# EAGLE board mapleCUx_large_088-Stripped (EAGLE 7.3.0)
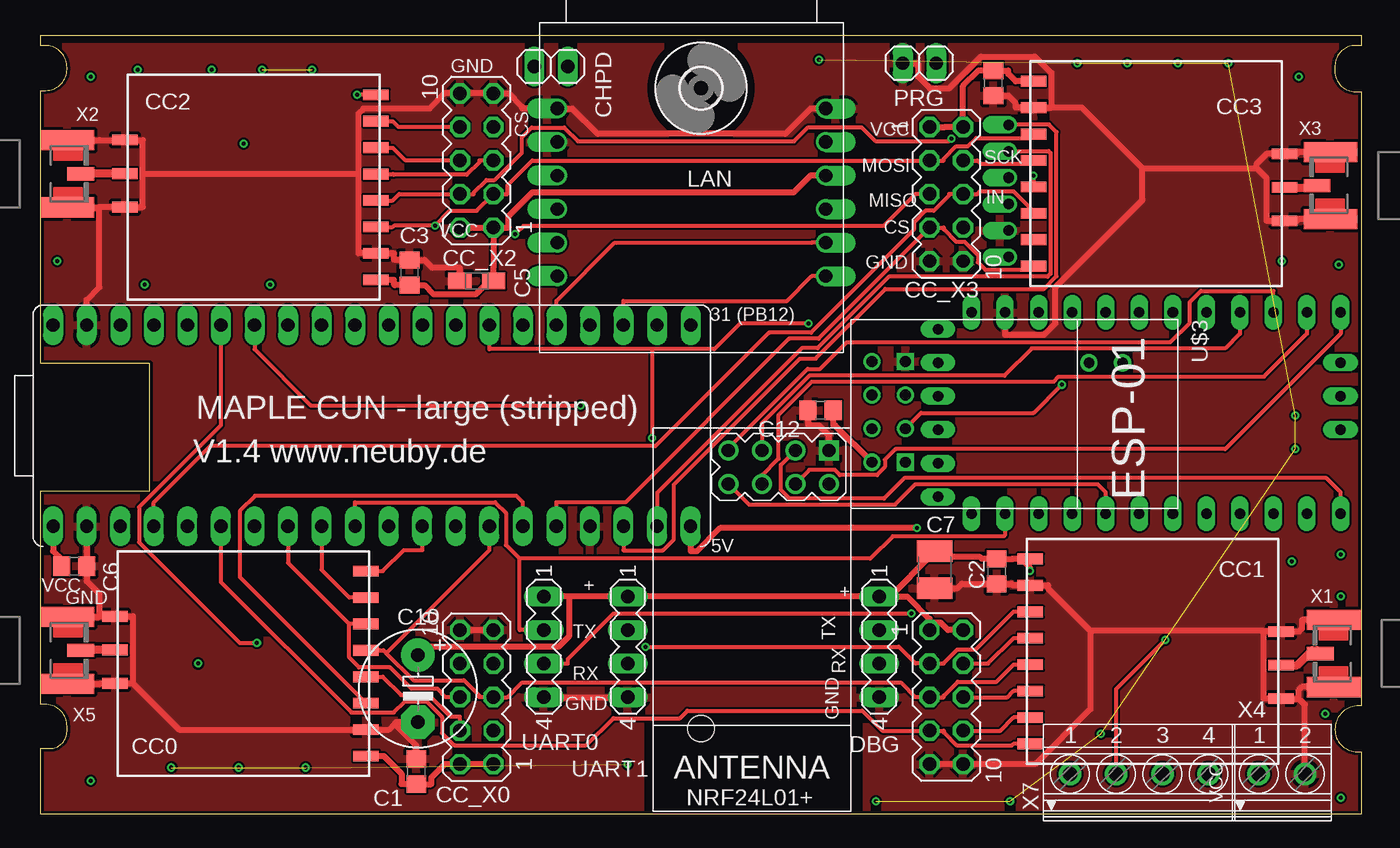
[diagram p0: board, top side]
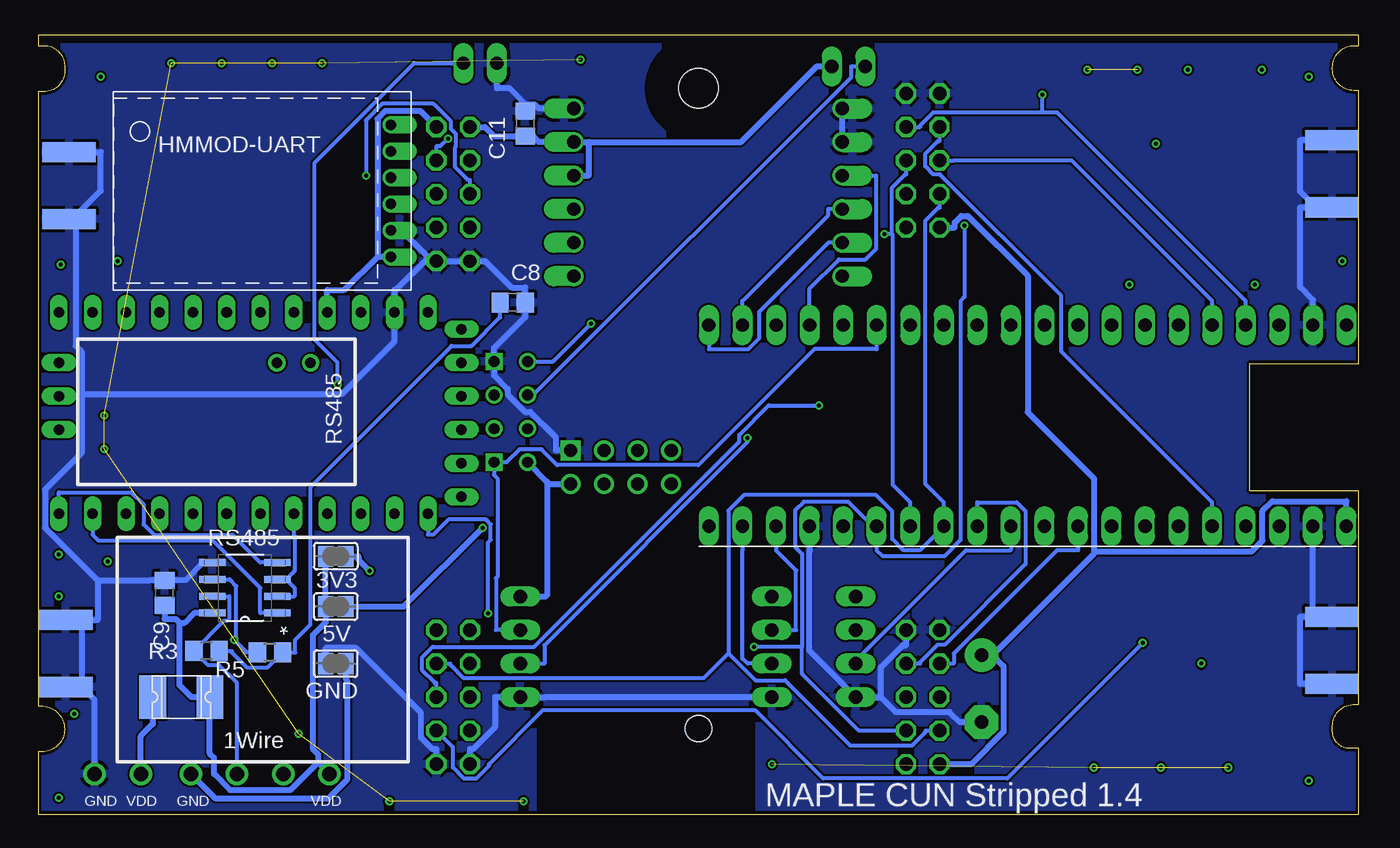
[diagram p1: board, bottom side, seen from below]

Size 100 x 59 mm. Coordinates in mm from the lower left corner, seen from the top.
Outline: 0,0 0,5 0.71,5 arc90 2,6.29 2,6.67 arc90 0.32,8.35 0,8.35 0,24.51 8.26,24.51 8.26,34.16 0,34.16 0,54.83 0.39,54.83 arc90 2,56.44 2,56.57 arc90 0.33,58.24 0,58.24 0,59 100,59 100,58.24 99.54,58.24 arc90 98,56.7 98,56.41 arc90 99.41,54.75 100,54.75 100,8.24 99.8,8.24 arc90 98,6.44 arc90 99.69,4.75 100,4.75 100,0 0,0
Copper layers (1*16): Top 0.035mm / dielectric 1.5mm / Bottom 0.035mm
Design rules "SeeedStudio_2layer_DRU_no_angle_20140221": minimum track width 6mil, minimum drill 12mil, track to track 6mil, track to pad 6mil, pad to pad 6mil, via to via 6mil, smd to smd 0mil, copper to edge 10mil, drill to drill 10mil, minimum pad ring 10mil, minimum via ring 6mil, stop-mask expansion 2mil, vias tented up to drill 100mil, thermal gap 10mil
Net classes: 0 default: width 0.305 mm; 1 PWR: width 0.457 mm
Holes 2 mm at 50,6.5
tRestrict: area 0,58.6 to 100,59; area 45.7,0 to 62.2,7
bRestrict: area 0,58.6 to 100,59; area 0,58.6 to 100,59; area 45.7,0 to 62.2,7

## Footprints (pad centres in the part's own frame; a part is rotated, then mirrored left to right if it is on the bottom)
SJ = smd 1.168 x 1.6: 1 -0.762,0; 2 0.762,0
C0805 = smd 1.3 x 1.5: 1 -0.95,0; 2 0.95,0
R/2012-12W = smd 1.75 x 1.26: + 1.275,0; - -1.275,0
C1210 = smd 1.6 x 2.7: 1 -1.4,0; 2 1.4,0
E5-8,5 = drill 1.016 pad 2.54: + -2.54,0 | drill 1.016 pad 2.54 octagon: - 2.54,0
CC1101_MODULE1_SMD = smd 1.93 x 0.813: ANT 19,5.96; CSN 0,0; GDO0 0,2; GDO2 0,4; GND@0 0,12; GND@1 19,8.5; GND@2 19,3.42; MISO 0,6; MOSI 0,10; SCLK 0,8; VCC 0,14
MA05-2 = drill 1.016 octagon: 1 -5.08,-1.27; 2 -5.08,1.27; 3 -2.54,-1.27; 4 -2.54,1.27; 5 0,-1.27; 6 0,1.27; 7 2.54,-1.27; 8 2.54,1.27; 9 5.08,-1.27; 10 5.08,1.27
1X02 = drill 1.016 long: 1 -1.27,0; 2 1.27,0
MA04-1 = drill 1.016 long: 1 -3.81,0; 2 -1.27,0; 3 1.27,0; 4 3.81,0
1812L = smd 2.03 x 3.3: P$1 -2.16,0; P$2 2.16,0
3,0 = hole 3: 0,0
HM-MOD-UART-DIL = drill 0.8 offset: 1 0,12; 2 0,10; 3 0,8; 4 0,6; 5 0,4; 6 0,2
USR-ES1 = drill 1 pad 1.35 offset: 1 -10.16,5.715; 2 -10.16,3.175; 3 -10.16,0.635; 4 -10.16,-1.905; 5 -10.16,-4.445; 6 -10.16,-6.985; 7 10.16,-6.985; 8 10.16,-4.445; 9 10.16,-1.905; 10 10.16,0.635; 11 10.16,3.175; 12 10.16,5.715
WIRELESS-NRF24L01 = drill 1 square: 1 -12.7,6.35 | drill 1: 2 -10.16,6.35; 3 -12.7,3.81; 4 -10.16,3.81; 5 -12.7,1.27; 6 -10.16,1.27; 7 -12.7,-1.27; 8 -10.16,-1.27
R0805 = smd 1.3 x 1.5: 1 -0.95,0; 2 0.95,0
SOIC127P600X175-8N = smd 1.981 x 0.533: 1 -2.464,1.905; 2 -2.464,0.635; 3 -2.464,-0.635; 4 -2.464,-1.905; 5 2.464,-1.905; 6 2.464,-0.635; 7 2.464,0.635; 8 2.464,1.905
20-DIP = drill 1.016 pad 1.27 long: 1 -24.13,-7.62; 2 -21.59,-7.62; 3 -19.05,-7.62; 4 -16.51,-7.62; 5 -13.97,-7.62; 6 -11.43,-7.62; 7 -8.89,-7.62; 8 -6.35,-7.62; 9 -3.81,-7.62; 10 -1.27,-7.62; 11 1.27,-7.62; 12 3.81,-7.62; 13 6.35,-7.62; 14 8.89,-7.62; 15 11.43,-7.62; 16 13.97,-7.62; 17 16.51,-7.62; 18 19.05,-7.62; 19 21.59,-7.62; 20 24.13,-7.62 | drill 1 pad 1.27 long: 21 24.13,7.62; 22 21.59,7.62; 23 19.05,7.62; 24 16.51,7.62; 25 13.97,7.62; 26 11.43,7.62; 27 8.89,7.62; 28 6.35,7.62; 29 3.81,7.62; 30 1.27,7.62; 31 -1.27,7.62; 32 -3.81,7.62; 33 -6.35,7.62; 34 -8.89,7.62; 35 -11.43,7.62; 36 -13.97,7.62; 37 -16.51,7.62; 38 -19.05,7.62; 39 -21.59,7.62; 40 -24.13,7.62
ABK-PRO-MINI = drill 0.8 long: A0 10.16,-3.81; A1 10.16,-6.35; A2 10.16,-8.89; A3 10.16,-11.43; A6 3.81,-21.59; A7 6.35,-21.59; D2 -5.08,-3.81; D3 -5.08,-6.35; D4 -5.08,-8.89; D5 -5.08,-11.43; D6 -5.08,-13.97; D7 -5.08,-16.51; D8 -5.08,-19.05; D9 -5.08,-21.59; D10 10.16,-21.59; D11 10.16,-19.05; D12 10.16,-16.51; D13 10.16,-13.97; DTR 8.89,8.89; GND 10.16,3.81; GND1 -5.08,-1.27; GND2 -3.81,8.89; GND3 -1.27,8.89; GND4 1.27,-21.59; RAW 10.16,6.35; RST 10.16,1.27; RST1 -5.08,1.27; RX1 -5.08,3.81; RX1-1 3.81,8.89; TX0 -5.08,6.35; TX0-1 6.35,8.89; VCC 10.16,-1.27; VCC1 1.27,8.89 | drill 0.8: A4 6.35,-5.08; A5 6.35,-2.54
ESP01 = drill 0.8: CH_PD -1.285,-8.178; GPIO0 1.255,-5.638; GPIO2 -1.285,-5.638; RST 1.255,-8.178; TX -3.825,-8.178; VCC 3.795,-8.178 | drill 0.8 square: GND -3.825,-5.638; RX 3.795,-5.638
SMA_EDGELAUNCH_UFL = smd 4.064 x 1.524: GND@1 2.032,-2.54; GND@2 2.032,2.54 | smd 4.064 x 1.524 bottom: GND@3 2.032,2.54; GND@4 2.032,-2.54 | smd 2.032 x 1.016: P 3.048,0
1751248 = drill 1.1 pad 1.7: 1 -1.75,-0.1; 2 1.75,-0.1
1751264 = drill 1.1 pad 1.7: 1 -5.25,-0.1; 2 -1.75,-0.1; 3 1.75,-0.1; 4 5.25,-0.1

## Placement (x,y rotation side)
3V3  [SJ]  77.47,19.56 180 bottom
5V  [SJ]  77.47,15.75 0 bottom
C1  22pF  [C0805]  28.45,3.25 270 top
C2  22pF  [C0805]  72.39,18.41 90 top
C3  22pF  [C0805]  27.94,41.04 270 top
C4  22pF  [C0805]  72.14,55.39 90 top
C5  10uF  [R/2012-12W]  33.02,40.4 0 top
C6  22pF  [C0805]  2.54,18.81 0 top
C7  4,7  [C1210]  67.69,18.54 90 top
C8  220p  [C0805]  64.07,38.78 0 bottom
C9  22p  [C0805]  90.42,16.79 270 bottom
C10  100uF  [E5-8,5]  28.57,9.53 270 top
C11  22pF  [C0805]  63.12,52.32 270 bottom
C12  22pF  [C0805]  59.05,30.61 180 top
CC0  CC1101  [CC1101_MODULE1_SMD]  24.64,18.43 180 top
CC1  CC1101_MODULE1SMD  [CC1101_MODULE1_SMD]  74.93,5.35 0 top
CC2  CC1101_MODULE1SMD  [CC1101_MODULE1_SMD]  25.4,54.5 180 top
CC4  CC1101_MODULE1SMD  [CC1101_MODULE1_SMD]  75.18,41.53 0 top
CC_X0  [MA05-2]  33.02,8.89 90 top
CC_X1  [MA05-2]  68.58,8.89 270 top
CC_X2  [MA05-2]  33.02,49.53 90 top
CC_X3  [MA05-2]  68.58,46.99 270 top
CHPD  [1X02]  38.64,56.64 180 top
DBG  [MA04-1]  63.5,12.7 270 top
F1  1812L  [1812L]  89.15,8.89 180 bottom
GND  [SJ]  77.47,11.43 0 bottom
H6  MOUNT-HOLE3.0  [3,0]  50,55 0 top
HMMOD-UART  HM-MOD-UARTDIL  [HM-MOD-UART-DIL]  73.28,54.23 180 bottom
IC2  LAN-USR-ES1  [USR-ES1]  49.28,47.75 0 top
NRF24L01+  NRF24L01+  [WIRELESS-NRF24L01]  53.34,14.88 270 top
PRG  [1X02]  66.55,56.9 180 top
R3  60  [R0805]  87.25,12.39 180 bottom
R5  60  [R0805]  82.44,12.27 180 bottom
RS485  MAX487ECSA+  [SOIC127P600X175-8N]  84.34,17.17 180 bottom
U$1  MAPLEMINI  [20-DIP]  25.08,29.45 180 bottom
U$2  ABK-PRO-MINI  [ABK-PRO-MINI]  76.83,27.87 90 top
U$3  ESP01  [ESP01]  71.12,30.48 270 top
UART0  [MA04-1]  38.1,12.7 270 top
UART1  [MA04-1]  44.45,12.7 270 top
X1  [SMA_EDGELAUNCH_UFL]  99.95,12.19 180 top
X2  [SMA_EDGELAUNCH_UFL]  0,48.51 0 top
X3  [SMA_EDGELAUNCH_UFL]  99.69,47.62 180 top
X4  1751248  [1751248]  93.98,3.17 0 top
X5  [SMA_EDGELAUNCH_UFL]  0,12.43 0 top
X7  1751264  [1751264]  83.19,3.17 0 top

## Library data of the parts
3V3 5V GND = jumper
C1-C12 R3 R5 = rcl
CC0 CC1 CC2 CC4 HMMOD-UART = wireless
CC_X0 CC_X1-CC_X3 DBG UART0 UART1 = con-lstb; OC_FARNELL: unknown; OC_NEWARK: unknown
CHPD PRG = pinhead
F1 = ptc-littlefuse
H6 = holes
IC2 = Martin-Communication
NRF24L01+ = diy-modules
RS485 = Maxim_By_element14_Batch_1; MPN: MAX487ECSA+; OC_FARNELL: 9724532; OC_NEWARK: 68K4803; PACKAGE: SOIC-8; SUPPLIER: Maxim
U$1 = maplemini-small
U$2 = Arduino-clone
U$3 = esp8266modules
X1-X3 X5 = adafruit
X4 = con-phoenix-350; OC_FARNELL: unknown; OC_NEWARK: unknown
X7 = con-phoenix-350; MPN: 1751264; OC_FARNELL: unknown; OC_NEWARK: 10R0934

## Nets
1W: R5.2 RS485.6 X7.2
2W: R3.2 RS485.7 X7.3
+5V [PWR]: 5V.2 U$1.21
CC_CS0: CC0.CSN CC_X0.7 U$1.29
CC_CS1: CC1.CSN CC_X1.7 U$1.35
CC_CS2: CC2.CSN CC_X2.7 U$1.4
CC_CS3: CC4.CSN CC_X3.7 U$1.25
CC_IN_0: CC0.GDO2 CC_X0.6 U$1.33
CC_IN_1: CC1.GDO2 CC_X1.6 U$1.7
CC_IN_2: CC2.GDO2 CC_X2.6 U$1.5
CC_IN_3: CC4.GDO2 CC_X3.6 U$1.37
CC_OUT_0: CC0.GDO0 CC_X0.8 U$1.32
CC_OUT_1: CC1.GDO0 CC_X1.8 U$1.6
CC_OUT_2: CC2.GDO0 CC_X2.8 U$1.36
CE-A: NRF24L01+.3 RS485.4 U$2.D9
CSN-A: NRF24L01+.4 U$2.D10
GD [PWR]: GND.2 X7.4
GND [PWR]: C1.1 C2.1 C3.1 C4.1 C5.- C6.2 C7.1 C8.2 C9.1 C10.- C11.1 C12.2 CC0.GND@0 CC0.GND@1 CC0.GND@2 CC1.GND@0 CC1.GND@1 CC1.GND@2 CC2.GND@0 CC2.GND@1 CC2.GND@2 CC4.GND@0 CC4.GND@1 CC4.GND@2 CC_X0.9 CC_X0.10 CC_X1.9 CC_X1.10 CC_X2.9 CC_X2.10 CC_X3.9 CC_X3.10 DBG.4 GND.1 HMMOD-UART.2 IC2.1 IC2.2 IC2.12 NRF24L01+.1 PRG.2 RS485.5 U$1.2 U$1.24 U$1.39 U$2.GND U$3.GND UART0.4 UART1.4 X1.GND@1 X1.GND@2 X1.GND@3 X1.GND@4 X2.GND@1 X2.GND@2 X2.GND@3 X2.GND@4 X3.GND@1 X3.GND@2 X3.GND@3 X3.GND@4 X4.2 X5.GND@1 X5.GND@2 X5.GND@3 X5.GND@4
IRQ-A: NRF24L01+.8 RS485.2 RS485.3 U$2.D2
MISO1: CC0.MISO CC1.MISO CC2.MISO CC4.MISO CC_X0.5 CC_X1.5 CC_X2.5 CC_X3.5 U$1.27
MISO2: IC2.7 U$1.18
MISO-A: NRF24L01+.7 U$2.D12
MOSI1: CC0.MOSI CC1.MOSI CC2.MOSI CC4.MOSI CC_X0.3 CC_X1.3 CC_X2.3 CC_X3.3 U$1.26
MOSI-A: NRF24L01+.6 U$2.D11
N$1: CC1.ANT X1.P
N$2: CC4.ANT X3.P
N$3: CC2.ANT X2.P
N$4: CC0.ANT X5.P
N$11: PRG.1 U$3.GPIO0
N$17: CHPD.2 U$3.CH_PD
N$21: C8.1 R3.1 R5.1
N$33: IC2.6
N$45 [PWR]: F1.P$2 X4.1
NRESET: U$1.34
RO-A: RS485.1 U$2.D8
RST: IC2.3 U$1.17
RX1: HMMOD-UART.5 U$1.22 UART1.3
RX-MAPLE: U$1.30 U$2.TX0 UART0.3
RX_DBG: DBG.3 U$1.14 U$3.TX
SCK1: CC0.SCLK CC1.SCLK CC2.SCLK CC4.SCLK CC_X0.4 CC_X1.4 CC_X2.4 CC_X3.4 U$1.28
SCK2: IC2.4 U$1.19
SCK-A: NRF24L01+.5 U$2.D13
SWCLK/TCK: U$1.10
SWDIO/TMS: U$1.11
SWO/TDO: U$1.8
TDI: U$1.9
TX1: HMMOD-UART.6 U$1.23 UART1.2
TX-MAPLE: U$1.31 U$2.RX1 UART0.2
TX_DBG: DBG.2 U$1.15 U$3.RX
VCC [PWR]: 3V3.1 C1.2 C2.2 C3.2 C4.2 C5.+ C6.1 C7.2 C10.+ C11.2 C12.1 CC0.VCC CC1.VCC CC2.VCC CC4.VCC CC_X0.1 CC_X0.2 CC_X1.1 CC_X1.2 CC_X2.1 CC_X2.2 CC_X3.1 CC_X3.2 CHPD.1 DBG.1 HMMOD-UART.1 IC2.10 IC2.11 NRF24L01+.2 U$1.40 U$2.VCC U$3.VCC UART0.1 UART1.1
VDD [PWR]: 3V3.2 5V.1 C9.2 F1.P$1 RS485.8 X7.1
WIZ_CS: IC2.5 U$1.20
WIZ_RST: IC2.8 U$1.16

## Tracks (layer width: path | path; a pad name or v marks a point on that pad's centre or on a via)
1W  (via drill 0.3 pad 0.61)
  Top 0.305: X7.2 81.44,9.51 v85.14,13.22
  Bottom 0.305: R5.2 84.35,12.27 84.35,12.43 v85.14,13.22 85,13.36 85,17.29 85.51,17.8 RS485.6
2W
  Bottom 0.305: X7.3 84.94,9.97 86.28,11.31 87.11,11.31 R3.2 85.9,14.69 85.69,14.69 85.51,14.87 85.51,16.53 RS485.7
+5V  (via drill 0.3 pad 0.61)
  Top 0.457: v66.36,21.7 51.44,21.7 49.68,19.94 49.21,19.94 U$1.21
  Bottom 0.457: 5V.2 72.31,15.75 v66.36,21.7
CC_CS0
  Top 0.305: CC0.CSN 25.91,18.43 27.49,20.02 28.89,20.02 U$1.29
  Bottom 0.305: CC_X0.7 33.22,11.43 33.22,11.54 31.9,12.86 31.35,12.86 25.24,18.97 25.24,22.98 25.9,23.64 28.89,23.64 U$1.29
CC_CS1
  Top 0.305: U$1.35 13.65,17.6 23.54,7.72 26.75,7.72 27.59,8.56 29.23,8.56 30.39,7.4 30.39,6.17 31.32,5.24 41.32,5.24 43.37,7.29 48.41,7.29 48.98,7.86 62.22,7.86 63.73,6.35 CC_X1.7 68.38,6.35 68.38,6.22 69.34,5.25 73.56,5.25 73.66,5.35 CC1.CSN
CC_CS2  (via drill 0.3 pad 0.61)
  Top 0.305: v23.98,54.5 24.13,54.5 CC2.CSN
  Bottom 0.305: 23.98,53.18 22.86,53.18 8.57,38.9 U$1.4 | 23.98,53.18 32.22,53.18 33.22,52.18 33.22,52.07 CC_X2.7 | 23.98,53.18 v23.98,54.5
CC_CS3
  Top 0.305: CC4.CSN 74.91,41.26 71.53,41.26 70.96,41.82 70.96,42.37 69.95,43.38 69.31,43.38 68.38,44.32 68.38,44.45 CC_X3.7 58.9,36.04 56.67,36.04 44.28,23.64 39.05,23.64 U$1.25
CC_IN_0
  Top 0.305: CC_X0.6 30.68,8.89 30.05,9.52 28.07,9.52 26.45,11.14 24.11,11.14 23.37,11.89 23.37,14.43 | CC0.GDO2 23.37,14.43 | U$1.33 18.73,20.02 18.73,19.07 23.37,14.43
CC_IN_1  (via drill 0.3 pad 0.61)
  Top 0.305: U$1.7 16.19,35.24 20.45,30.98 v40.89,30.98 | CC_X1.6 73.2,8.89 73.66,9.35 CC1.GDO2
  Bottom 0.305: v40.89,30.98 44.69,30.98 46.91,28.76 46.91,28.25 62.46,12.7 70.12,12.7 70.92,11.9 70.92,10.92 69.96,9.96 69.85,9.96 CC_X1.6
CC_IN_2
  Top 0.305: CC2.GDO2 26.67,50.5 27.64,49.53 CC_X2.6
  Bottom 0.305: CC_X2.6 30.68,49.53 21.75,49.53 11.11,38.9 U$1.5
CC_IN_3
  Top 0.305: U$1.37 8.57,23.64 12.83,27.89 46.55,27.89 55.16,36.5 58.34,36.5 66.12,44.28 66.12,44.83 67.01,45.72 67.62,45.72 68.78,46.88 68.78,46.99 CC_X3.6 70.92,46.99 71.13,47.2 73.67,47.2 75.18,45.68 CC4.GDO2
CC_OUT_0
  Top 0.305: CC0.GDO0 23.37,16.43 21.27,18.53 U$1.32
  Bottom 0.305: CC_X0.8 30.68,11.43 30.68,12.18 22.85,20.02 21.27,20.02 U$1.32
CC_OUT_1  (via drill 0.3 pad 0.61)
  Top 0.305: U$1.6 13.65,29.46 7.46,23.27 7.46,20.61 15.08,13 v16.38,13 | CC1.GDO0 73.66,7.35 72.66,6.35 CC_X1.8
  Bottom 0.305: v16.38,13 26.63,2.74 40.57,2.74 45.71,7.88 61.81,7.88 65.87,3.82 65.87,3.68 66.84,2.71 67.75,2.71 68.6,3.56 68.6,5.1 CC_X1.8
CC_OUT_2
  Top 0.305: CC2.GDO0 26.67,52.5 27.1,52.07 CC_X2.8
  Bottom 0.305: CC_X2.8 31.75,51 31.86,51 32.83,50.03 32.83,49.09 32.2,48.46 31.71,48.46 22.54,39.3 22.54,35.07 11.11,23.64 U$1.36
CE-A
  Top 0.305: U$2.D9 98.42,24.4 97.35,25.48 65.4,25.48 63.85,23.93 56.7,23.93 56.05,24.58 56.05,26.48 NRF24L01+.3
  Bottom 0.305: RS485.4 83.18,19.07 85.28,21.18 91.22,21.18 92.01,21.96 92.01,23.47 92.95,24.4 98.42,24.4 U$2.D9
CSN-A
  Top 0.305: NRF24L01+.4 58.21,26.09 60.13,26.09 60.52,25.71 63.33,25.71 63.92,26.3 63.92,26.87 64.72,27.68 89.69,27.68 98.42,36.42 U$2.D10
GD
  Bottom 0.457: X7.4 86.57,1.21 78.04,1.21 76.62,2.62 76.62,10.16 76.71,10.25 GND.2
GND
  Top 0.457: 4.45,15.01 4.45,16.73 3.49,17.68 C6.2 3.49,19.94 U$1.39 | 4.45,15.01 CC0.GND@2 6.98,15.01 6.98,9.93 | 4.45,15.01 4.45,14.97 X5.GND@2 | 92.08,48.93 92.84,48.17 92.84,44.95 CC4.GND@2 95.11,44.95 95.25,45.09 X3.GND@2 | 92.08,48.93 92.08,49.27 92.84,50.03 CC4.GND@1 95.11,50.03 95.25,50.16 X3.GND@1 | 83.43,48.93 92.08,48.93 | 83.43,48.93 78.84,53.53 76.53,53.53 | 83.43,48.93 83.43,46.53 76.83,39.93 76.83,37.18 76,36.34 73.03,36.34 U$2.GND | C12.2 58.1,29.48 58.92,29.48 59.69,28.71 NRF24L01+.1 | 79.49,13.91 79.49,8 75.3,3.81 CC_X1.10 CC_X1.9 | 92.58,13.85 92.53,13.91 79.49,13.91 | 79.49,13.91 76.28,17.12 76.28,17.35 CC1.GND@0 73.58,17.35 73.52,17.41 73.52,17.46 C2.1 69.75,17.46 69.42,17.14 C7.1 | 76.53,53.53 CC4.GND@0 73.84,53.53 73.84,53.87 73.27,54.44 C4.1 | PRG.2 66.42,56.9 66.42,55.9 67.33,54.99 68.79,54.99 71.2,57.4 75.28,57.4 76.53,56.14 76.53,53.53 | 92.58,13.85 93.26,13.85 CC1.GND@1 95.28,13.85 95.5,14.08 95.5,14.73 X1.GND@1 | 92.58,13.85 92.58,8.77 CC1.GND@2 95.28,8.77 | IC2.12 58.3,53.47 56.38,51.55 42.17,51.55 40.25,53.47 IC2.1 36.47,53.47 36.47,53.57 35.43,54.61 CC_X2.9 CC_X2.10 30.61,54.61 29.46,53.47 24.45,53.47 24.05,53.07 24.05,48.54 | X4.2 95.73,8.32 95.28,8.77 | X1.GND@2 95.5,9.65 95.28,9.42 95.28,8.77 | 26.81,6.87 26.92,6.99 C10.- | 26.81,6.87 26.37,6.43 CC0.GND@0 10.48,6.43 6.98,9.93 | 26.81,6.87 28.45,5.24 C1.1 | 6.98,9.93 CC0.GND@1 4.49,9.93 4.45,9.89 X5.GND@1 | 24.05,48.54 24.05,42.5 CC2.GND@0 26.75,42.5 26.75,42.05 26.81,41.99 C3.1 29.07,41.99 29.64,41.41 31.75,41.41 C5.- | 7.75,48.54 24.05,48.54 | 7.75,48.54 7.75,51.08 CC2.GND@2 4.47,51.08 4.45,51.05 X2.GND@2
  Top 0.457: 7.75,48.54 7.75,46 CC2.GND@1 4.47,46 4.45,45.97 | U$1.2 3.49,38.97 4.45,39.93 4.45,45.97 | X2.GND@4 4.45,45.97 | UART0.4 UART1.4 | CC_X0.10 CC_X0.9
  Bottom 0.457: 70.45,42.19 70.17,41.91 CC_X3.10 CC_X3.9 66.17,41.91 64.17,39.91 63.12,39.91 C8.2 63.12,37.65 63.18,37.65 65.48,35.34 U$3.GND 65.48,33.27 64.45,32.23 64.45,31.79 63.15,30.5 62.74,30.5 60.83,28.57 60.83,27.57 NRF24L01+.1 | 96.71,31.85 96.71,27.38 99.47,24.61 99.47,21.71 95.5,17.74 | 96.71,31.85 96.71,35.05 97.16,35.49 97.16,45.09 97.41,45.09 | 96.71,31.85 76.99,31.85 73.03,35.82 U$2.GND 73.03,39.72 72.92,39.72 70.45,42.19 | CC_X0.9 34.29,12.83 34.53,12.83 36.2,11.16 36.2,8.89 | 36.2,8.89 36.35,8.89 UART0.4 41.59,12.38 41.59,19.94 U$1.24 | C10.- 30.23,6.99 30.99,7.75 35.05,7.75 36.2,8.89 | X2.GND@2 4.45,51.05 4.45,47.18 3.24,45.97 | 3.24,45.97 4.45,45.97 4.45,39.93 3.49,38.97 U$1.2 | X2.GND@4 3.24,45.97 | 70.45,42.19 72.48,44.23 HMMOD-UART.2 | UART1.4 46.35,8.89 61.59,8.89 DBG.4 65.41,8.89 65.41,6.62 67.07,4.95 67.31,4.95 CC_X1.9 | GND.1 78.23,12.61 75.93,12.61 71.01,7.69 71.01,5.83 70.14,4.95 69.85,4.95 CC_X1.10 | X4.2 95.73,8.67 96.71,9.65 | 63.12,53.79 64.32,54.99 65.28,54.99 PRG.2 | X1.GND@2 96.71,9.65 | 96.71,14.73 95.5,14.73 95.5,17.74 | X1.GND@1 96.71,14.73 | 96.71,14.73 96.71,9.65 | 95.5,17.74 91.56,17.74 C9.1 88.83,17.74 87.49,19.07 RS485.5 | 97.41,45.09 95.25,47.24 95.25,50.16 X3.GND@1 | X3.GND@2 97.41,45.09 | IC2.12 62.08,53.47 62.4,53.79 63.12,53.79 | C11.1 63.12,53.79 | IC2.1 39.12,51.21 39.4,50.93 IC2.2 | 3.24,14.97 3.49,15.22 U$1.39 | 3.24,14.97 4.45,14.97 4.45,9.89 X5.GND@1 | X5.GND@2 3.24,14.97
  pour Bottom: 0,0 0,58.42 100.33,58.42 100.33,0
  pour Top: 0,0 0,58.42 100.33,58.42 100.33,0
IRQ-A
  Top 0.305: NRF24L01+.8 53.64,23.47 64.69,23.47 66.24,25.02 80.03,25.02 80.64,24.4 U$2.D2
  Bottom 0.305: U$2.D2 80.64,21.18 80.58,21.12 80.58,18.45 81.23,17.8 | RS485.2 80.58,16.53 80.58,17.16 81.23,17.8 | RS485.3 81.23,17.8
MISO1  (via drill 0.3 pad 0.61)
  Top 0.305: 26.17,12.21 33.97,20.02 U$1.27 | 26.17,12.21 25.95,12.43 25.67,12.43 CC0.MISO | 26.17,12.21 28.23,10.16 32.06,10.16 33.22,9 33.22,8.89 CC_X0.5 35.36,8.89 36.47,10 65.13,10 66.24,8.89 CC_X1.5 68.38,8.89 68.38,8.99 69.44,10.06 72.37,10.06 73.66,11.35 CC1.MISO | v75.18,48.4 CC4.MISO | v35.93,43.95 36.55,44.58 63.83,44.58 66.24,46.99 CC_X3.5 | CC2.MISO 26.67,48.5 26.73,48.44 32.27,48.44 33.22,49.4 33.22,49.53 CC_X2.5
  Bottom 0.305: 35.36,43.95 35.31,43.91 35.31,24.98 33.97,23.64 U$1.27 | CC_X3.5 67.31,48.06 67.44,48.06 68.42,49.03 68.42,50.54 68.36,50.6 68.36,51.53 68.75,51.92 68.75,52.49 70.08,53.81 73.94,53.81 75.18,52.57 v75.18,48.4 | 35.36,43.95 35.36,47.48 34.37,48.46 34.29,48.46 CC_X2.5 | 35.36,43.95 v35.93,43.95
MISO2
  Top 0.305: IC2.7 58.38,40.77 56.51,38.9 44.13,38.9 U$1.18
MISO-A
  Top 0.305: NRF24L01+.7 52.07,27.75 58.08,33.75 59.03,33.75 61.03,35.76 85.53,35.76 87,37.23 87,38.79 87.85,39.64 93.34,39.64 U$2.D12
MOSI1  (via drill 0.3 pad 0.61)
  Top 0.305: v45.79,12.7 64.97,12.7 66.24,11.43 CC_X1.3 68.38,11.43 68.38,11.47 69.41,12.5 70.81,12.5 73.66,15.35 CC1.MOSI | U$1.26 36.51,23.64 36.02,24.13 16.24,24.13 15.08,22.97 15.08,17.99 CC0.MOSI | CC2.MOSI 26.67,44.5 26.76,44.59 v29.86,44.59 30.98,45.72 33.02,45.72 CC_X2.3 35.36,46.99 35.36,47.66 37.23,49.53 CC_X3.3 68.38,49.53 68.38,49.66 69.31,50.6 70.2,50.6 70.84,51.23 74.88,51.23 CC4.MOSI
  Bottom 0.305: v29.86,44.59 29.86,39.2 30.16,38.9 30.16,20.8 31.4,19.56 36.05,19.56 36.51,20.02 36.51,21.52 | 42.16,12.7 v45.79,12.7 | 42.16,12.7 42.16,10.67 37.84,6.35 35.36,6.35 CC_X0.3 | 36.51,21.52 36.51,21.54 38.65,23.68 42.03,23.68 42.68,23.03 42.68,20.27 42.16,19.75 42.16,12.7 | U$1.26 36.51,21.52
MOSI-A
  Top 0.305: NRF24L01+.6 54.61,25.68 55.88,26.95 55.88,30.26 58.4,32.78 76.7,32.78 77.08,33.16 92.62,33.16 95.89,36.42 U$2.D11
N$1
  Top 0.61: CC1.ANT 95.13,11.31 96.27,12.45 96.65,12.45 X1.P
N$2
  Top 0.61: CC4.ANT 96.51,47.49 X3.P
N$3
  Top 0.61: CC2.ANT 3.07,48.54 X2.P
N$4
  Top 0.61: CC0.ANT 3.09,12.47 X5.P
N$5  (via drill 0.3 pad 0.61)  (1 unrouted)
  other vias: 20.57,56.39 16.76,56.39
N$6  (via drill 0.3 pad 0.61)
  other vias: 3.81,55.88
N$7  (via drill 0.3 pad 0.61)
  other vias: 1.27,41.91
N$8  (via drill 0.3 pad 0.61)  (3 unrouted)
  other vias: 44.45,3.81 20.07,3.56 14.99,3.56 9.91,3.56
N$9  (via drill 0.3 pad 0.61)
  other vias: 3.81,2.54
N$11  (via drill 0.3 pad 0.61)
  Top 0.305: U$3.GPIO0 66.67,30.41 75.19,30.41 v77.33,32.55
  Bottom 0.305: v77.33,32.55 77.33,34.24 79.06,35.98 79.06,49.38 71.55,56.9 PRG.1
N$13  (via drill 0.3 pad 0.61)
  other vias: 7.37,56.39
N$14  (via drill 0.3 pad 0.61)
  other vias: 12.95,56.39
N$16  (via drill 0.3 pad 0.61)
  other vias: 95.25,55.88
N$17
  Bottom 0.305: CHPD.2 38.44,56.64 38.44,55.84 62.52,31.77 U$3.CH_PD
N$21
  Bottom 0.305: C8.1 65.02,37.67 67.2,35.49 68.7,35.49 79.38,24.82 79.38,14.39 80.54,13.23 80.54,12.27 R5.1 82.61,11.15 84.22,11.15 85.34,12.27 85.34,12.39 R3.1
N$22  (via drill 0.3 pad 0.61)
  other vias: 7.87,40.13
N$23  (via drill 0.3 pad 0.61)
  other vias: 15.37,50.8
N$25  (via drill 0.3 pad 0.61)
  other vias: 17.4,40.13
N$28  (via drill 0.3 pad 0.61)
  other vias: 11.94,11.43
N$35  (via drill 0.3 pad 0.61)
  other vias: 98.42,1.27
N$37  (via drill 0.3 pad 0.61)  (9 unrouted)
  other vias: 58.93,57.15 78.49,56.9 82.3,56.9 86.11,56.9 89.92,56.9 95,30.23 95,27.69 80.26,6.1 73.41,1.02 63.25,1.02
N$39  (via drill 0.3 pad 0.61)
  other vias: 93.98,41.91
N$40  (via drill 0.3 pad 0.61)
  other vias: 98.42,16.51
N$41  (via drill 0.3 pad 0.61)
  other vias: 97.28,7.62
N$42  (via drill 0.3 pad 0.61)
  other vias: 98.42,19.68
N$43  (via drill 0.3 pad 0.61)
  other vias: 94.74,19.18
N$44  (via drill 0.3 pad 0.61)
  other vias: 98.3,41.66
N$45
  Bottom 0.457: F1.P$2 91.31,6.86 92.23,5.94 X4.1
RO-A
  Bottom 0.305: RS485.1 83.18,15.26 83.18,17.15 86.75,20.72 95.43,20.72 95.89,21.18 U$2.D8
RST
  Bottom 0.305: IC2.3 36.55,48.39 36.55,42.84 37.35,42.04 39.38,42.04 41.59,39.83 U$1.17
RX1
  Top 0.305: HMMOD-UART.5 76.31,50.24 76.45,50.1 76.45,40.95 76.23,40.72 64.23,40.72 58.82,35.31 57.63,35.31 46.67,24.36 U$1.22
  Bottom 0.305: U$1.22 46.67,20.02 46.67,11.82 46.28,11.43 UART1.3
RX-MAPLE  (via drill 0.3 pad 0.61)
  Top 0.305: UART0.3 39.93,11.43 39.93,11.77 43.38,15.22 v65.94,15.22
  Bottom 0.305: U$2.TX0 70.48,21.18 70.09,21.18 68.94,22.33 66.09,22.33 65.73,21.97 65.73,20.8 65.94,20.59 v65.94,15.22 | U$1.30 26.35,20.02 29.75,20.02 38.1,11.67 UART0.3
RX_DBG  (via drill 0.3 pad 0.61)
  Top 0.305: 46.3,35.24 33.97,35.24 U$1.14 | v58.15,37.19 52.96,37.19 51.01,35.24 46.3,35.24 | 46.3,35.24 v46.3,28.5
  Bottom 0.305: DBG.3 61.67,11.43 61.67,12.83 46.3,28.2 v46.3,28.5 | U$3.TX 61.03,34.3 v58.15,37.19
SCK1  (via drill 0.3 pad 0.61)
  Top 0.305: CC_X0.4 31.75,7.42 31.02,7.42 29.37,9.06 27.28,9.06 25.91,10.43 CC0.SCLK | CC_X1.4 71.74,11.43 73.66,13.35 CC1.SCLK | v68.98,51.2 68.78,51 63.2,51 62.16,52.04 58.12,52.04 57.05,50.98 40.68,50.98 39.64,52.02 37.19,52.02 36.45,51.29 36.45,50.12 34.39,48.06 33.75,48.06 32.82,47.12 32.82,46.99 CC_X2.4 27.16,46.99 26.67,46.5 CC2.SCLK | CC_X3.4 70.92,49.53 71.18,49.27 74.92,49.27 CC4.SCLK
  Bottom 0.305: 47.74,12.21 45.69,10.16 43.45,10.16 38.53,5.24 33.82,5.24 32.82,6.24 32.82,6.35 CC_X0.4 | 47.74,12.21 47.74,23.02 46.57,24.18 36.56,24.18 35.32,22.95 35.32,20.86 34.47,20.02 33.24,20.02 U$1.28 31.43,23.64 32.85,25.06 32.85,44.95 31.88,45.92 31.75,45.92 CC_X2.4 | 47.74,12.21 49.62,10.32 67.78,10.32 68.78,11.32 68.78,11.43 CC_X1.4 | CC_X3.4 69.85,50.6 69.58,50.6 v68.98,51.2
SCK2
  Bottom 0.305: IC2.4 40.17,45.85 40.17,45.4 46.67,38.9 U$1.19
SCK-A
  Top 0.305: U$2.D13 90.81,36.42 89.69,35.3 75.04,35.3 72.97,33.24 58.21,33.24 54.61,29.64 NRF24L01+.5
TX1
  Top 0.305: U$1.23 44.13,20.02 47.12,20.02 47.94,20.84 47.94,24.98 57.49,34.53 58.69,34.53 63.95,39.79 75.94,39.79 76.91,40.76 76.91,51.67 76.35,52.24 HMMOD-UART.6
  Bottom 0.305: U$1.23 44.13,20.02 42.62,18.5 42.62,13.97 UART1.2
TX-MAPLE
  Top 0.305: 36.27,19.38 62.83,19.38 64.52,21.07 72.92,21.07 73.03,21.18 U$2.RX1 | 36.27,19.38 35.24,20.41 35.24,22.82 34.42,23.64 23.81,23.64 U$1.31 | 36.27,19.38 36.27,13.97 UART0.2
TX_DBG
  Bottom 0.305: U$1.15 36.51,35.24 41.23,35.24 50.01,26.47 60.7,26.47 61.88,27.64 63.56,27.64 64.52,26.68 U$3.RX 65.48,25.73 65.22,25.46 65.22,18.01 65.33,17.9 65.33,13.97 DBG.2
VCC  (via drill 0.3 pad 0.61)
  Top 0.457: CC_X0.1 CC_X0.2 30.61,3.81 29.58,2.78 29.58,2.31 C1.2 27.32,2.31 27.32,3.1 25.98,4.43 CC0.VCC | 64.45,16.51 64.45,16.63 67.31,19.49 67.69,19.49 | 64.45,16.51 65.41,16.51 65.62,16.51 67.31,14.82 67.31,14.54 | 64.45,16.51 DBG.1 UART1.1 40.01,16.51 | 40.01,16.51 UART0.1 | 40.01,16.51 40.01,13.49 39.22,12.7 29.21,12.7 C10.+ | 74.26,19.35 74.89,18.72 v74.89,18.44 | 74.26,19.35 73.58,19.35 73.57,19.36 C2.2 71.26,19.36 71.13,19.49 67.69,19.49 | CC1.VCC 74.26,19.35 | IC2.10 58.3,48.39 57.03,47.12 37.24,47.12 35.43,45.31 35.43,44.45 CC_X2.1 | CC_X2.2 CC_X2.1 | C12.1 60.01,29.48 60.15,29.48 U$3.VCC | C7.2 67.69,19.49 | CC_X3.1 68.45,52.07 CC_X3.2 69.85,55.18 71,56.34 C4.2 73.27,56.34 73.27,56.1 73.84,55.53 CC4.VCC | CC_X1.2 68.71,13.97 68.14,14.54 67.31,14.54 | CC_X1.1 67.31,14.54 | CC_X2.1 34.29,43.31 34.29,41.42 34.3,41.41 34.3,40.76 | 34.3,40.76 32.93,39.39 29.77,39.39 29.07,40.09 C3.2 26.81,40.09 26.75,40.15 26.75,40.5 CC2.VCC | C5.+ 34.3,40.76 | U$1.40 0.95,19.94 1.59,19.3 C6.1
  Bottom 0.457: 27.75,12.06 26.92,11.23 26.92,6.25 29.36,3.81 CC_X0.2 | C10.+ 27.75,12.06 | 20.06,19.93 20.06,19.75 27.75,12.06 | CC_X2.2 30.61,44.45 30.61,44.83 30.11,45.33 29.61,45.33 25.08,40.8 25.08,30.45 20.06,25.43 20.06,19.93 | 20.06,19.93 8.1,19.93 7.3,20.74 7.3,22.97 6.56,23.72 0.95,23.72 U$1.40 | v74.89,18.44 75.74,19.3 75.74,19.56 3V3.1 | U$2.VCC 78.11,39.72 76.83,39.72 74.31,42.23 | HMMOD-UART.1 74.31,42.23 | CC_X3.2 71.05,53.27 73.71,53.27 74.31,52.67 74.31,42.23 | CC_X3.1 66.17,52.07 65.47,51.37 C11.2 62.53,51.37 62.08,50.93 IC2.11 58.3,50.93 | 58.3,50.93 46.77,50.93 41.05,56.64 CHPD.1 | 58.3,50.93 58.3,48.39 IC2.10 | 61.45,25.04 NRF24L01+.2 | U$3.VCC 61.45,25.2 61.45,25.04 | 61.45,25.04 61.45,16.65 61.59,16.51 DBG.1
VDD
  Bottom 0.457: C9.2 90.42,14.81 89.57,14.81 89.29,14.53 | 89.29,14.53 88.92,14.53 88.18,15.26 RS485.8 | 89.29,14.53 89.29,9.79 88.39,8.89 F1.P$1 86.99,4.62 86.69,4.31 86.69,3.07 85.46,1.84 80.92,1.84 78.81,3.95 | 78.81,3.95 78.81,4.58 79.22,4.98 79.22,13.58 78.23,14.57 5V.1 3V3.2 | 78.81,3.95 | 78.81,3.95 X7.1
WIZ_CS
  Bottom 0.305: IC2.5 40.17,43.31 45.4,38.08 45.4,36.06 46.23,35.24 49.21,35.24 U$1.20
WIZ_RST
  Top 0.305: IC2.8 58.38,43.31 43.46,43.31 39.05,38.9 U$1.16

## Text on the board
tNames: GND | CS | CC3 | VCC | MOSI | SCK | LAN | MISO | IN | VCC | CS | GND | 31 (PB12) | MAPLE CUN - large (stripped) | V1.4 www.neuby.de | 5V | VCC | + | GND | + | TX | TX | RX | RX | GND | GND | VCC
bNames: RS485 | 1Wire | MAPLE CUN Stripped 1.4 | VDD | GND | VDD | GND